# Altium PCB PCB1.PcbDoc
Units mm, origin at the board's own origin, x right, y up, seen from the top; angles counter-clockwise.
Board outline 74.3 x 48.13 mm, 2 copper layers (Top Layer, Bottom Layer); 11 components, 10 nets, 51 pads, 0 vias.
Unrouted connection lines stored in the file: 4.
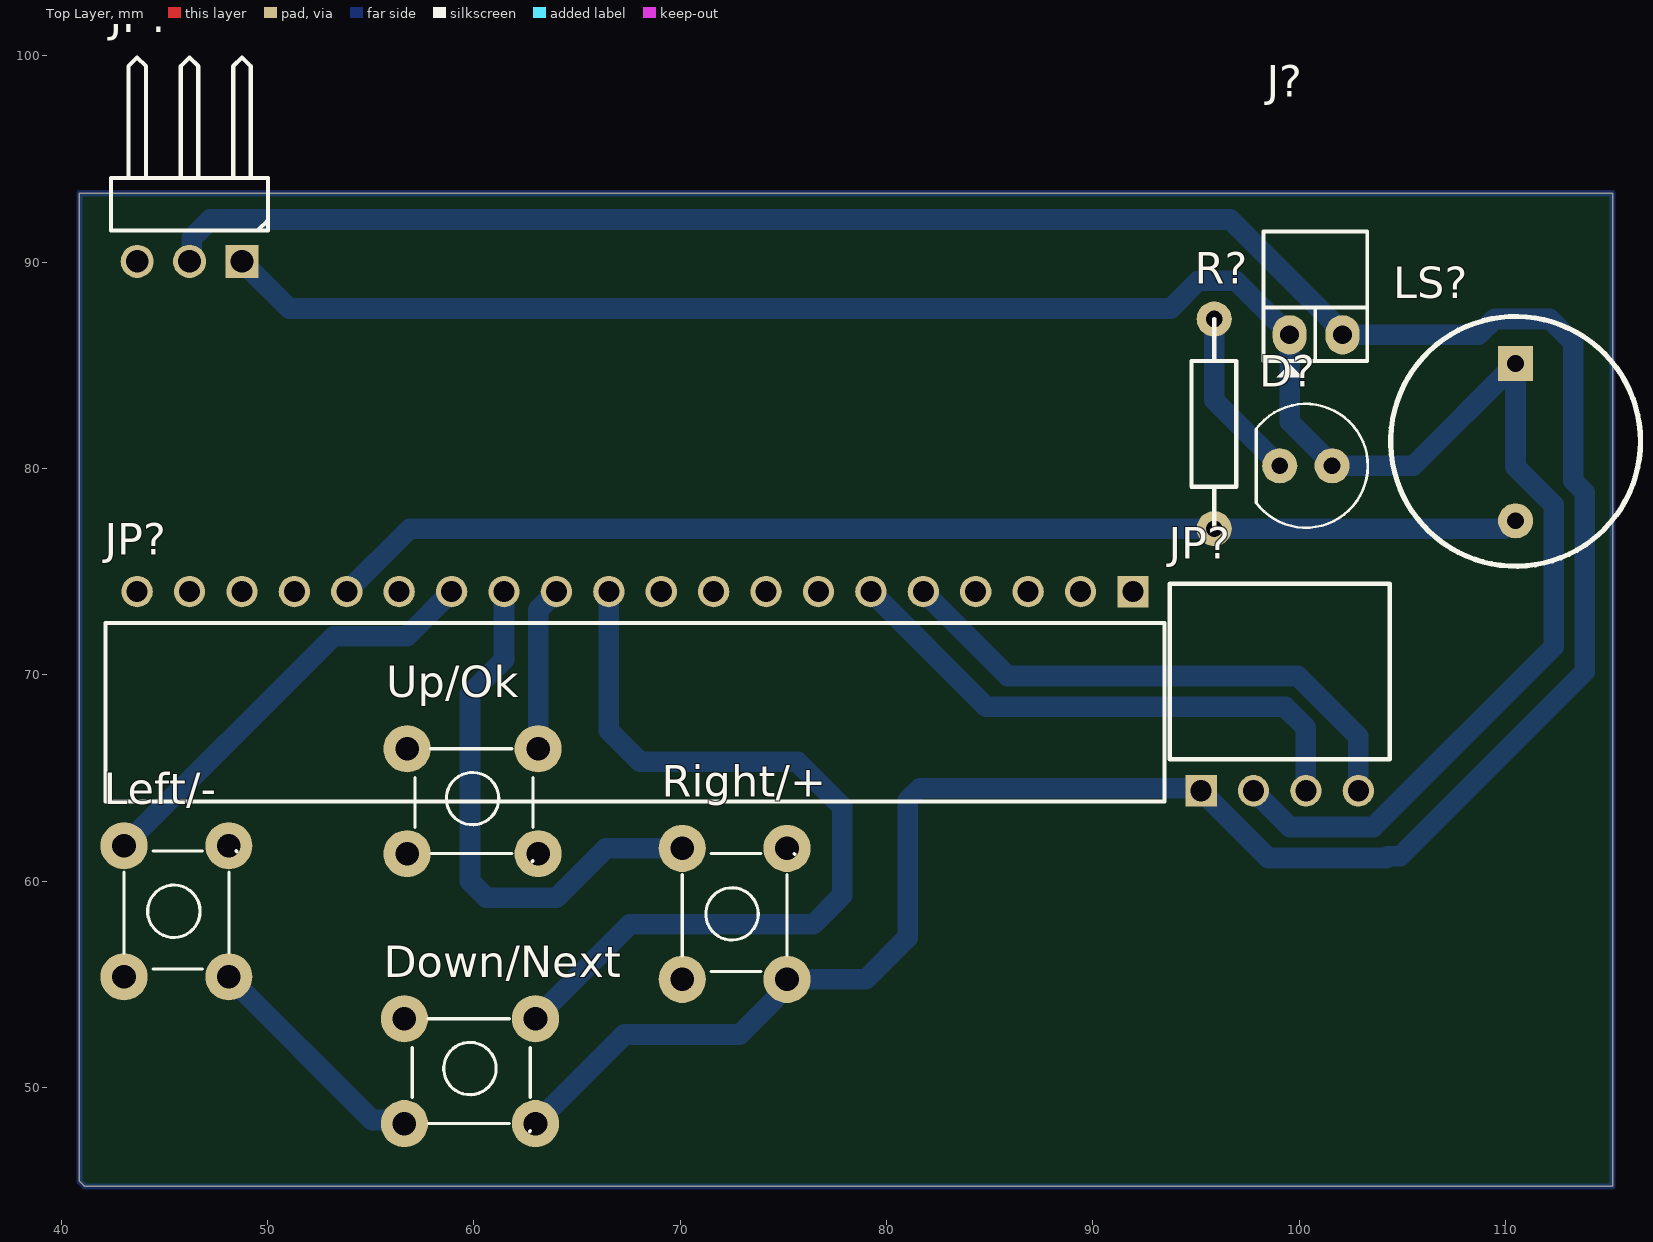
[diagram p0: Top Layer view]
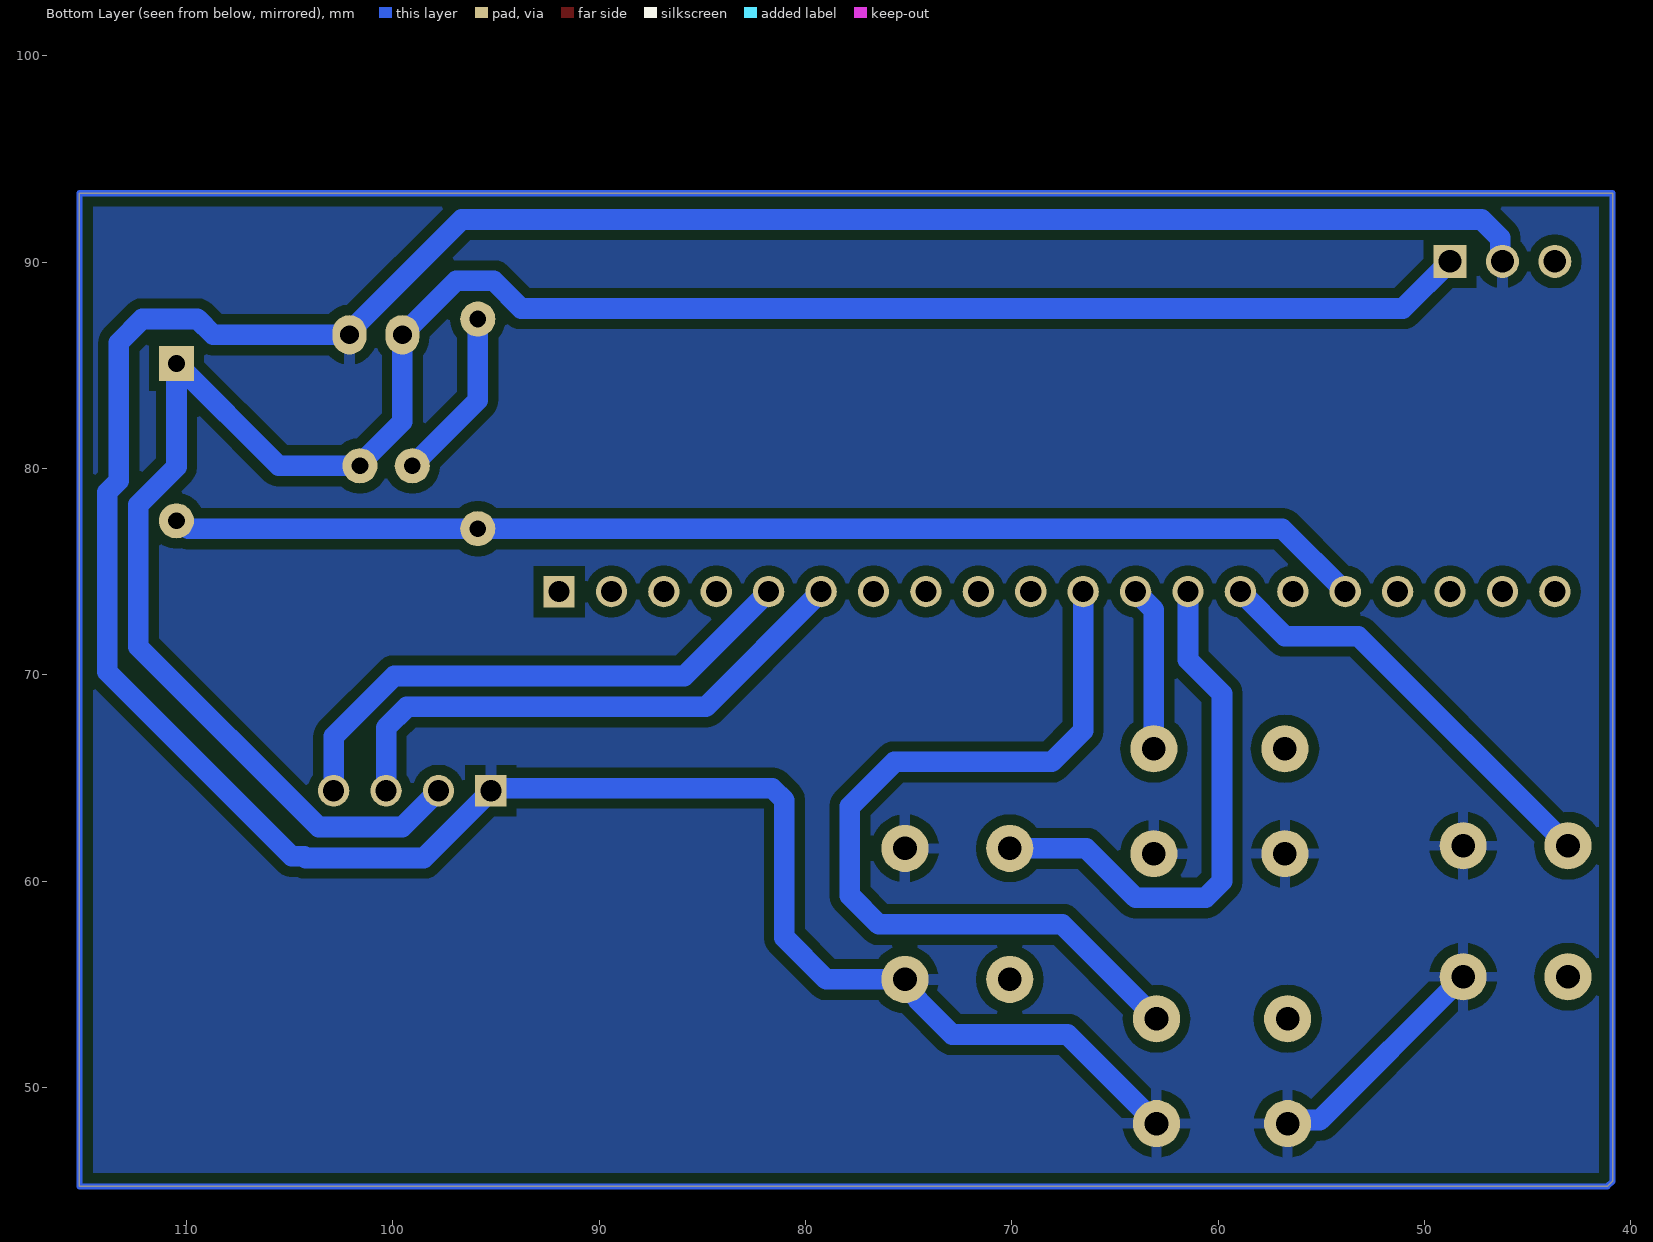
[diagram p1: Bottom Layer view, seen from below]
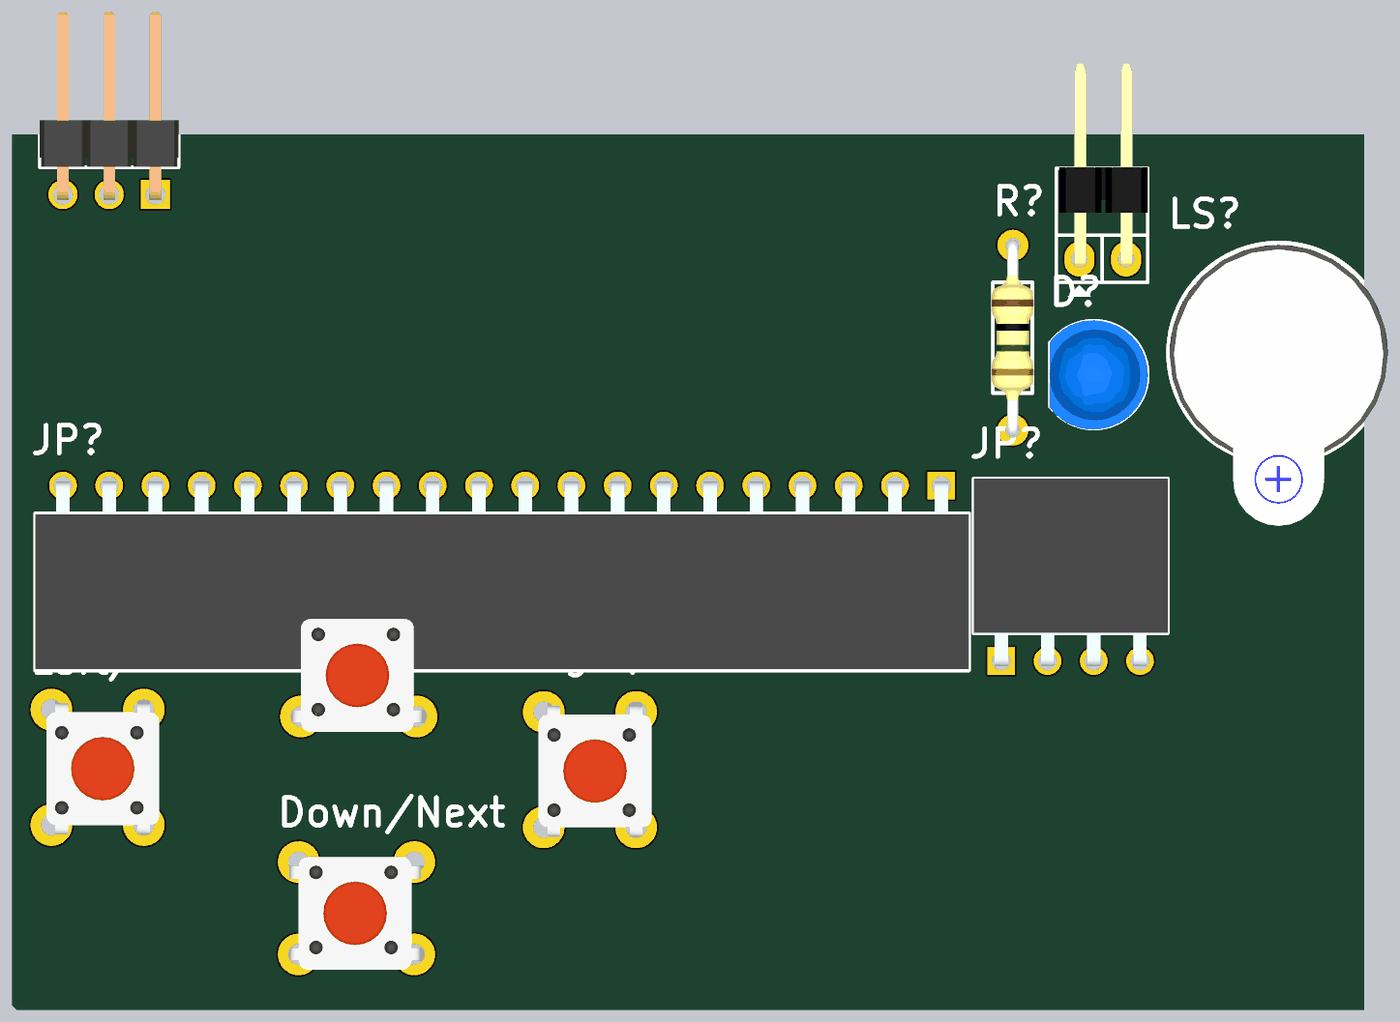
[diagram p2: 3D render of the assembled board from above, using the file's embedded part models]

## Layer stack, top to bottom
Top Solder: solder mask 0.0102, Solder Resist, Dk 3.5
Top Layer: signal copper 0.0356
Dielectric 1: dielectric 0.32, FR-4, Dk 4.8
Bottom Layer: signal copper 0.0356
Bottom Solder: solder mask 0.0102, Solder Resist, Dk 3.5

## Board outline
41.148,45.212 40.894,45.466 40.894,93.345 115.189,93.345 115.189,45.212

## Design rules (kind name [scope] priority, off if disabled: settings)
Clearance [All] p1: gap=0.5 ignorepadtopadclearanceinfootprint=FALSE
PolygonConnect [All] p1: connectstyle=Relief reliefconductorwidth=0.5 reliefentries=4 polygonreliefangle="90 Angle" airgapwidth=0.5
RoutingVias [All] p1: holewidth=0.711 width=1.27 viastyle="Through Hole" minholewidth=0.711 minwidth=1.27 maxholewidth=0.711 maxwidth=1.27
SolderMaskExpansion [All] p1: expansion=0.102 istentingtop=FALSE
Width [All] p1: maxlimit=2 minlimit=0.5 preferedwidth=1
30 further rules are at their usual default settings.

## Classes and differential pairs
component class Sheet1: D? Down/Next JP? Left/- LS? R? Right/+ Up/Ok

## Components (designator, comment, footprint, x,y, rotation, side; value= is the part's Value field where it differs from the comment)
D? "LED" "LED-0 5mm BLUE" 100.33,80.137 r270 top
Down/Next "SW" SW4 56.642,53.34 r0 top value="Button chip 4 pin"
J? "Jumper 2" jp2h 99.543,86.487 r0 top value="JP 2"
JP? "JP 1x3 2.54" "JP 1x3 DC" 42.418,92.583 r180 top
JP? "JP 1x20 2.54" "JP 1x20 CC" 67.818,74.041 r180 top
JP? "LCD" "JP 1x4 CC" 99.06,64.389 r0 top
Left/- "SW" SW4 43.053,55.372 r90 top value="Button chip 4 pin"
LS? "Buzzer" Buzzer 110.49,85.09 r270 top
R? "RESISTOR" "Res 10mm (1/2W)" 95.885,82.169 r270 top value=1K
Right/+ "SW" SW4 70.104,55.245 r90 top value="Button chip 4 pin"
Up/Ok "SW" SW4 56.769,66.421 r0 top value="Button chip 4 pin"

## Footprints (in the part's own frame and the unit in brackets; to place one, negate y for a bottom-side part, rotate by r counter-clockwise, add the part's x,y. Pads: shape width x height; smd on the part's side, far side on the other; paste and mask are expansions set on the pad)
Buzzer [mil] "Buzzer; Solder Pad 35mil"
  rect 67x67 hole 32: 1(0,0)
  round 67 hole 32: 2(300,0)
  silkscreen extent -90,-238 387,238, body extent -86,-236 522,236, height 177
jp2h [mil]
  oval 65x75 hole 36: 1(0,0) 2(101,0)
  silkscreen extent -50,-81 148,197, body extent -44,-14 148,424, height 99
"JP 1x3 DC" [mm]
  rect 1.6x1.6 hole 1.1: 1(-6.35,2.54)
  round 1.6 hole 1.1: 2(-3.81,2.54) 3(-1.27,2.54)
  silkscreen extent -7.62,-7.34 0,1.04, body extent -7.62,-7.52 0,2.84, height 2.55
"JP 1x4 CC" [mm]
  rect 1.52x1.52 hole 1.02: 1(-3.81,0)
  round 1.52 hole 1.02: 2(-1.27,0) 3(1.27,0) 4(3.81,0)
  silkscreen extent -5.33,1.52 5.33,10.03, body extent -5.33,-0.25 5.33,10.05, height 2.51
"JP 1x20 CC" [mm] "20p 1 row Right angle"
  rect 1.52x1.52 hole 1.02: 1(-24.13,0)
  round 1.52 hole 1.02: 2(-21.59,0) 3(-19.05,0) 4(-16.51,0) 5(-13.97,0) 6(-11.43,0) 7(-8.89,0) 8(-6.35,0) 9(-3.81,0) 10(-1.27,0) 11(1.27,0) 12(3.81,0) 13(6.35,0) 14(8.89,0) 15(11.43,0) 16(13.97,0) 17(16.51,0) 18(19.05,0) 19(21.59,0) 20(24.13,0)
  silkscreen extent -25.65,1.52 25.65,10.17, body extent -25.65,-0.21 25.65,10.09, height 2.51
"LED-0 5mm BLUE" [mil] "Typical LED; BLUE; 2 Leads; Solder Pad 35mil"
  round 67 hole 32: 1(0,50) 2(0,-50)
  silkscreen extent -118,-96 118,118, body extent -118,-96 119,117, height 345
"Res 10mm (1/2W)" [mil] "Resistor; 2 Leads; 1/2W; Solder Pad 35mil"
  round 67 hole 32: 1(-200,0) 2(200,0)
  silkscreen extent -200,-43 200,42, body extent -212,-46 212,45, height 96
SW4 [mil] "SW button 4pin, 250 x250 mil"
  round 90 hole 45: 1(0,0) 2(250,-200) 3(250,0) 4(0,-200)
  silkscreen extent 15,-215 240,0, body extent -34,-233 278,11, height 276

## Part data
D?: "Typical LED", LatestRevisionDate=08-Jul-2005, LatestRevisionNote="Mech Layer 1 removed.", PackageReference=LED-1, Published=8-Jun-2000, Publisher="Altium Limited"
Down/Next Left/- Right/+ Up/Ok: library part SW4, "Switch button 4 pin"
J?: library part "JP 2"
JP?: library part "JP 1x3 2.54 Duc Cong", "Cắm", Chung_Loai=Cắm, Don_Vi=Con, Ma_Hang=MH000904, Ten_Linh_Kien="Jump Đơn Đực 2.54MM 1x40P Cong Đứng"
JP?: library part "JP 1x20 2.54 Cai Cong", "Cắm", Chung_Loai=Cắm, Don_Vi=Con, Ma_Hang=MH001265, Ten_Linh_Kien="Jump Đơn Cái 2.54MM 1x40P Cong"
JP?: library part "JP 1x4 2.54 Cai Cong", "Cắm", Chung_Loai=Cắm, Don_Vi=Con, Ma_Hang=MH001265, Ten_Linh_Kien="Jump Đơn Cái 2.54MM 1x40P Cong"
LS?: "Magnetic Transducer Buzzer", ComponentLink1Description="Manufacturer Link", ComponentLink1URL=http://www.megastar.com/linecard/buzzmode/index.php, DatasheetDocument=17-Dec-2003, LatestRevisionDate=17-Dec-2003, LatestRevisionNote="Schematic revised, PCB Footprint replaced.", PackageReference=ABSM-1574, Published=24-Mar-1999, Publisher="Altium Limited"
R?: "Resistor", LatestRevisionDate=17-Jul-2002, LatestRevisionNote="Re-released for DXP Platform.", PackageReference=AXIAL-0.3, Published=8-Jun-2000, Publisher="Altium Limited"

## Nets (pads, with @x,y where several pads share a name; then routed paths per layer and width w, separated by ;. In a path a pad name is that pad's centre, name@x,y a point inside that pad or via, vN(x,y) a via of type N, cw(c..) or ccw(c..) an arc to the next point about the centre after c; other vN are vias at no path point)
5V: D?.1 J?.1 JP?.1@48.768,90.043 JP?.2@97.79,64.389 LS?.1 | length 104.9
  Bottom Layer w1: JP?.1@48.768,90.043 51.054,87.757 93.775,87.757 95.118,89.1 96.93,89.1 J?.1 99.543,82.272 101.6,80.215 D?.1 105.537,80.137 LS?.1 110.49,80.088 112.341,78.237 112.341,71.371 103.599,62.629 99.55,62.629 JP?.2@97.79,64.389
Buzzer: JP?.16 LS?.2 R?.2 | length 58.1
  Bottom Layer w1: JP?.16 56.896,77.089 R?.2 109.919,77.089 110.3,77.47 LS?.2
Down: Down/Next.1 Down/Next.3 JP?.11 | length 41.2
  Bottom Layer w1: Down/Next.3 67.564,57.912 76.454,57.912 77.851,59.309 77.851,63.627 75.692,65.786 68.072,65.786 66.548,67.31 JP?.11
GND: Down/Next.2 Down/Next.4 J?.2 JP?.1@95.25,64.389 JP?.2@46.228,90.043 Left/-.2 Left/-.4 Right/+.2 Right/+.4 Up/Ok.2 Up/Ok.4 | length 166.2
  Bottom Layer w1: JP?.2@46.228,90.043 46.343,90.158 46.343,91.174 47.244,92.075 96.663,92.075 102.108,86.63 J?.2 108.712,86.487 109.474,87.249 112.141,87.249 113.284,86.106 113.284,79.415 113.841,78.858 113.841,70.153 104.902,61.214 104.305,61.214 104.22,61.129 98.51,61.129 95.25,64.389 95.123,64.516 81.612,64.516 81.026,63.93 81.026,57.277 78.994,55.245 Right/+.4 75.184,54.897 74.541,54.254 74.541,54.221 72.898,52.578 67.31,52.578 Down/Next.2 ; Left/-.4 55.075,48.43 56.472,48.43 Down/Next.4
Left: JP?.14 Left/-.1 Left/-.3 | length 21
  Bottom Layer w1: Left/-.3 53.213,71.882 56.769,71.882 JP?.14
NetD?_2: D?.2 R?.1 | length 8.4
  Bottom Layer w1: R?.1 95.885,83.312 D?.2
Right: JP?.13 Right/+.1 Right/+.3 | length 26.3
  Bottom Layer w1: JP?.13 61.468,70.739 59.817,69.088 59.817,59.998 60.617,59.198 64.007,59.198 66.404,61.595 Right/+.3
SCL: JP?.3@100.33,64.389 JP?.6 | length 26.9
  Bottom Layer w1: JP?.6 84.836,68.453 99.314,68.453 100.33,67.437 JP?.3@100.33,64.389
SDA: JP?.4@102.87,64.389 JP?.5 | length 26.6
  Bottom Layer w1: JP?.5 85.876,69.953 99.935,69.953 102.87,67.018 JP?.4@102.87,64.389
Up: JP?.12 Up/Ok.1 Up/Ok.3 | length 8
  Bottom Layer w1: Up/Ok.3 63.119,73.152 JP?.12
pads on no net: JP?.1@91.948,74.041 JP?.2@89.408,74.041 JP?.3@43.688,90.043 JP?.3@86.868,74.041 JP?.4@84.328,74.041 JP?.7 JP?.8 JP?.9 JP?.10 JP?.15 JP?.17 JP?.18 JP?.19 JP?.20
copper on no net: | length 244.7
  Bottom Layer w0.3: 40.894,45.466 40.894,93.345 115.189,93.345 115.189,45.212 41.148,45.212 40.894,45.466

## Polygon pours and split planes (outlines as drawn)
no net on Bottom Layer "NONET_L02_P001" (solid, pour order 1): 57.658,105.283
GND on Bottom Layer "GND_L02_P000" (solid, pour order 0): 40.894,93.345 40.894,45.466 114.935,45.466 115.189,45.212 115.189,93.345